# EAGLE board RFM-XXXXS panel (EAGLE 6.3)
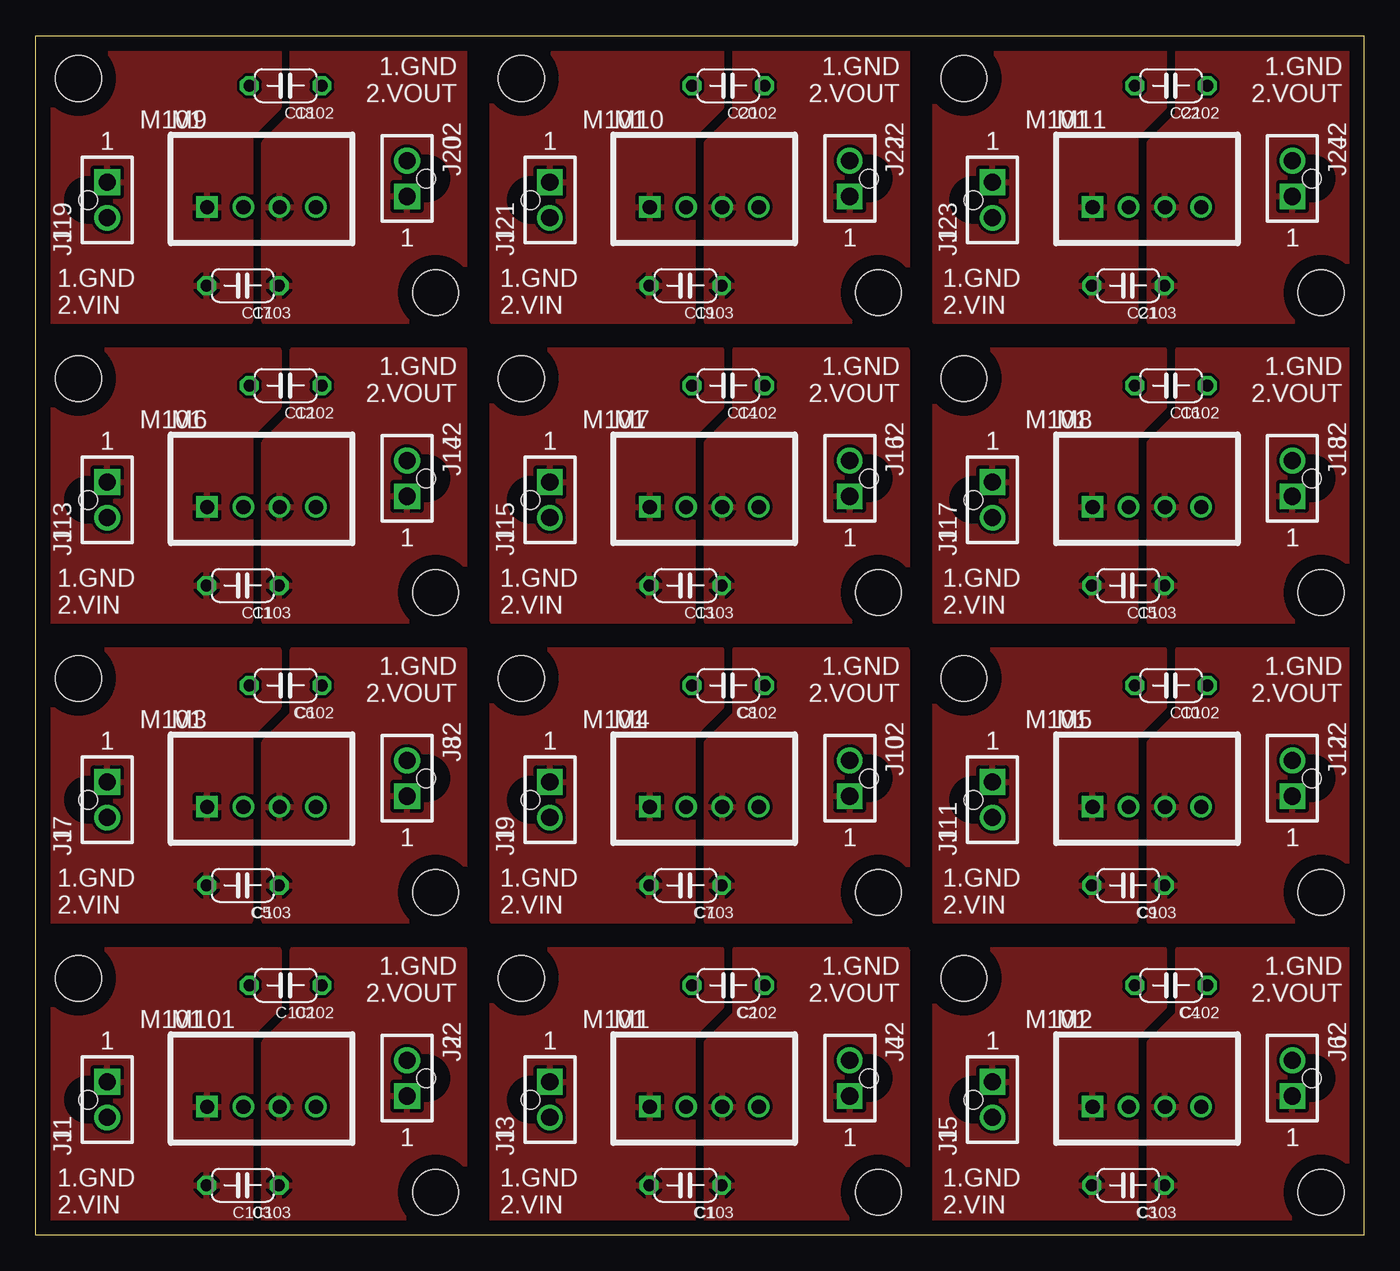
[diagram p0: board, top side]
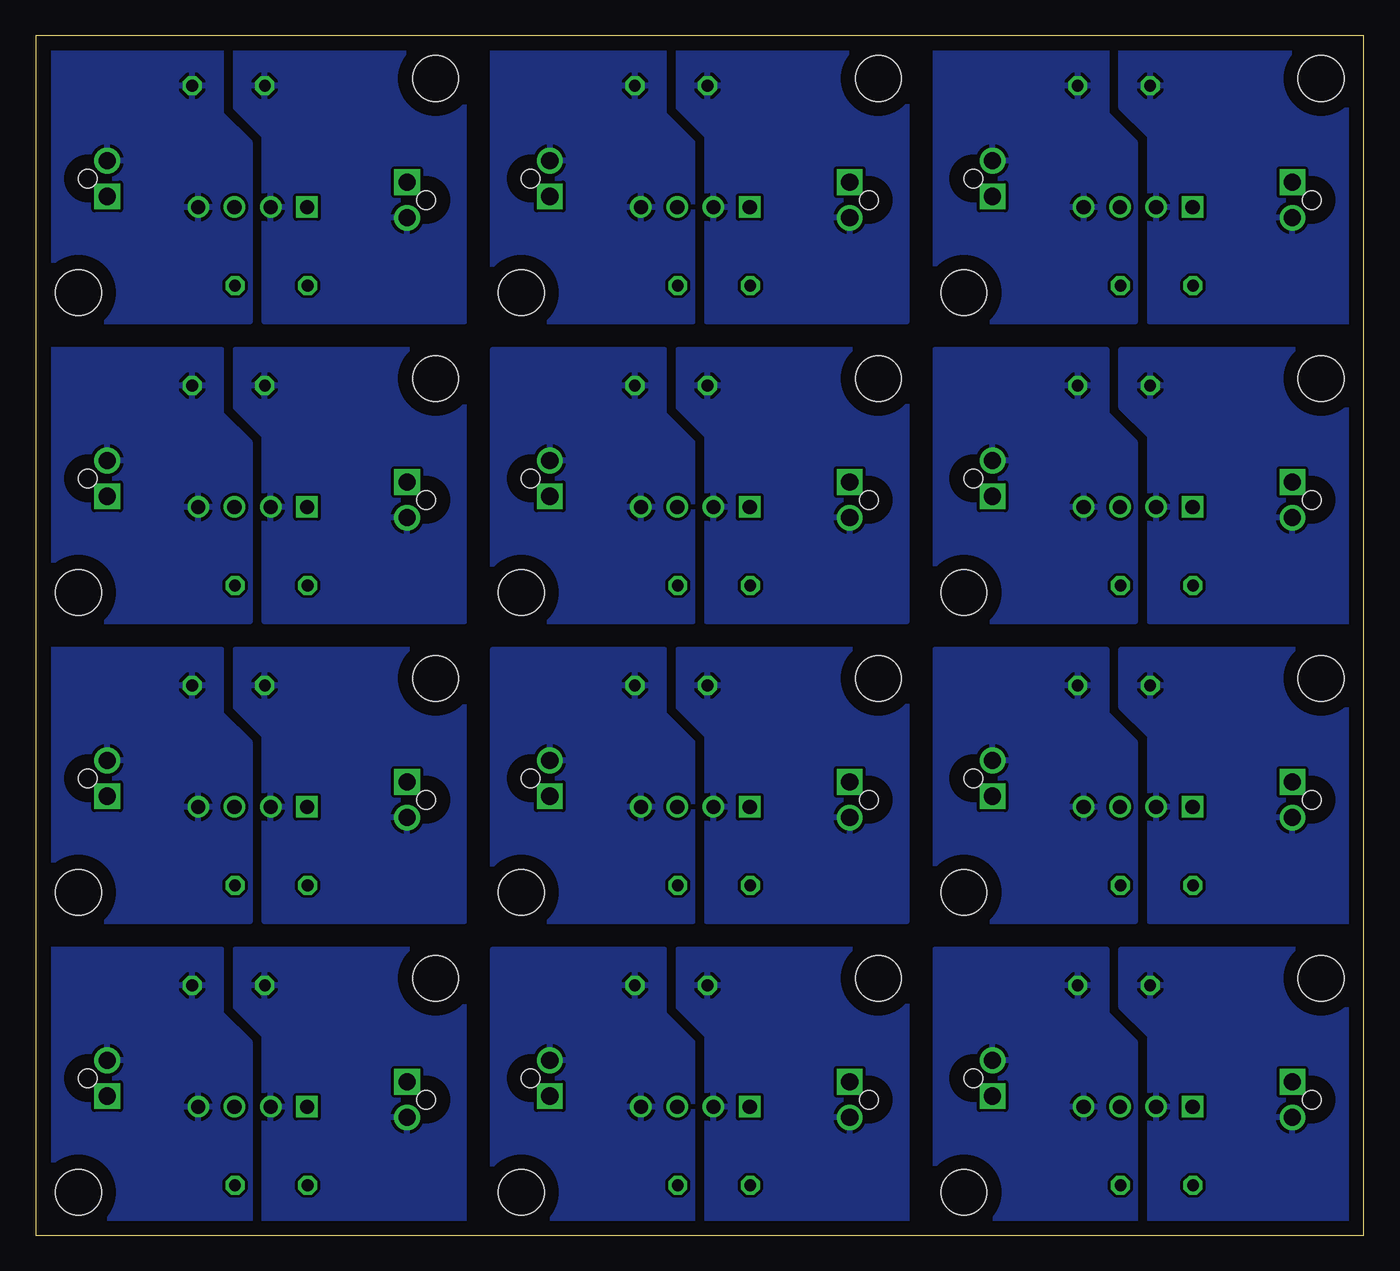
[diagram p1: board, bottom side, seen from below]

Size 93 x 84 mm. Coordinates in mm from the lower left corner, seen from the top.
Outline: 0,84 93,84 93,0 0,0 0,84
Copper layers (1*16): Top 0.035mm / dielectric 1.5mm / Bottom 0.035mm
Design rules "default": minimum track width 10mil, minimum drill 24mil, track to track 8mil, track to pad 8mil, pad to pad 8mil, via to via 8mil, smd to smd 8mil, copper to edge 40mil, drill to drill 8mil, minimum pad ring 10mil, minimum via ring 8mil, stop-mask expansion 4mil, vias tented up to drill 0mil, thermal gap 10mil
Holes 3.2 mm at 3,18 28,3 34,18 59,3 65,18 90,3 3,39 28,24 34,39 59,24 65,39 90,24 3,60 28,45 34,60 59,45 65,60 90,45 3,81 28,66 34,81 59,66 65,81 90,66

## Footprints (pad centres in the part's own frame; a part is rotated, then mirrored left to right if it is on the bottom)
C050-024X044 = drill 0.813 octagon: 1 -2.54,0; 2 2.54,0
PINS_2-NANOFIT = drill 1.2 square: 1 -1.25,0 | drill 1.2: 2 1.25,0 | hole 1.3: 0,-1.34
RFM-XXXXS = drill 1 square: 1 0,0 | drill 1: 2 2.54,0; 3 5.08,0; 4 7.62,0

## Placement (x,y rotation side)
C1  1n 2kV  [C050-024X044]  45.5,3.5 180 top
C2  1n 2kV  [C050-024X044]  48.5,17.5 180 top
C3  1n 2kV  [C050-024X044]  76.5,3.5 180 top
C4  1n 2kV  [C050-024X044]  79.5,17.5 180 top
C5  1n 2kV  [C050-024X044]  14.5,24.5 180 top
C6  1n 2kV  [C050-024X044]  17.5,38.5 180 top
C7  1n 2kV  [C050-024X044]  45.5,24.5 180 top
C8  1n 2kV  [C050-024X044]  48.5,38.5 180 top
C9  1n 2kV  [C050-024X044]  76.5,24.5 180 top
C10  1n 2kV  [C050-024X044]  79.5,38.5 180 top
C11  1n 2kV  [C050-024X044]  14.5,45.5 180 top
C12  1n 2kV  [C050-024X044]  17.5,59.5 180 top
C13  1n 2kV  [C050-024X044]  45.5,45.5 180 top
C14  1n 2kV  [C050-024X044]  48.5,59.5 180 top
C15  1n 2kV  [C050-024X044]  76.5,45.5 180 top
C16  1n 2kV  [C050-024X044]  79.5,59.5 180 top
C17  1n 2kV  [C050-024X044]  14.5,66.5 180 top
C18  1n 2kV  [C050-024X044]  17.5,80.5 180 top
C19  1n 2kV  [C050-024X044]  45.5,66.5 180 top
C20  1n 2kV  [C050-024X044]  48.5,80.5 180 top
C21  1n 2kV  [C050-024X044]  76.5,66.5 180 top
C22  1n 2kV  [C050-024X044]  79.5,80.5 180 top
C102  1n 2kV  [C050-024X044]  17.5,17.5 180 top
C103  1n 2kV  [C050-024X044]  14.5,3.5 180 top
J1  PINS_2-NANOFIT-105309-1102  [PINS_2-NANOFIT]  5,9.5 270 top
J2  PINS_2-NANOFIT-105309-1102  [PINS_2-NANOFIT]  26,11 90 top
J3  PINS_2-NANOFIT-105309-1102  [PINS_2-NANOFIT]  36,9.5 270 top
J4  PINS_2-NANOFIT-105309-1102  [PINS_2-NANOFIT]  57,11 90 top
J5  PINS_2-NANOFIT-105309-1102  [PINS_2-NANOFIT]  67,9.5 270 top
J6  PINS_2-NANOFIT-105309-1102  [PINS_2-NANOFIT]  88,11 90 top
J7  PINS_2-NANOFIT-105309-1102  [PINS_2-NANOFIT]  5,30.5 270 top
J8  PINS_2-NANOFIT-105309-1102  [PINS_2-NANOFIT]  26,32 90 top
J9  PINS_2-NANOFIT-105309-1102  [PINS_2-NANOFIT]  36,30.5 270 top
J10  PINS_2-NANOFIT-105309-1102  [PINS_2-NANOFIT]  57,32 90 top
J11  PINS_2-NANOFIT-105309-1102  [PINS_2-NANOFIT]  67,30.5 270 top
J12  PINS_2-NANOFIT-105309-1102  [PINS_2-NANOFIT]  88,32 90 top
J13  PINS_2-NANOFIT-105309-1102  [PINS_2-NANOFIT]  5,51.5 270 top
J14  PINS_2-NANOFIT-105309-1102  [PINS_2-NANOFIT]  26,53 90 top
J15  PINS_2-NANOFIT-105309-1102  [PINS_2-NANOFIT]  36,51.5 270 top
J16  PINS_2-NANOFIT-105309-1102  [PINS_2-NANOFIT]  57,53 90 top
J17  PINS_2-NANOFIT-105309-1102  [PINS_2-NANOFIT]  67,51.5 270 top
J18  PINS_2-NANOFIT-105309-1102  [PINS_2-NANOFIT]  88,53 90 top
J19  PINS_2-NANOFIT-105309-1102  [PINS_2-NANOFIT]  5,72.5 270 top
J20  PINS_2-NANOFIT-105309-1102  [PINS_2-NANOFIT]  26,74 90 top
J21  PINS_2-NANOFIT-105309-1102  [PINS_2-NANOFIT]  36,72.5 270 top
J22  PINS_2-NANOFIT-105309-1102  [PINS_2-NANOFIT]  57,74 90 top
J23  PINS_2-NANOFIT-105309-1102  [PINS_2-NANOFIT]  67,72.5 270 top
J24  PINS_2-NANOFIT-105309-1102  [PINS_2-NANOFIT]  88,74 90 top
M1  RFM0505S  [RFM-XXXXS]  43,9 0 top
M2  RFM0505S  [RFM-XXXXS]  74,9 0 top
M3  RFM0505S  [RFM-XXXXS]  12,30 0 top
M4  RFM0505S  [RFM-XXXXS]  43,30 0 top
M5  RFM0505S  [RFM-XXXXS]  74,30 0 top
M6  RFM0505S  [RFM-XXXXS]  12,51 0 top
M7  RFM0505S  [RFM-XXXXS]  43,51 0 top
M8  RFM0505S  [RFM-XXXXS]  74,51 0 top
M9  RFM0505S  [RFM-XXXXS]  12,72 0 top
M10  RFM0505S  [RFM-XXXXS]  43,72 0 top
M11  RFM0505S  [RFM-XXXXS]  74,72 0 top
M101  RFM0505S  [RFM-XXXXS]  12,9 0 top

## Library data of the parts
C1-C22 C102 C103 J1-J24 M1-M11 M101 = nolan-utsa

## Nets
0VIN: C103.2 J1.1 M101.1
0VIN1: C1.2 J3.1 M1.1
0VIN2: C3.2 J5.1 M2.1
0VIN3: C5.2 J7.1 M3.1
0VIN4: C7.2 J9.1 M4.1
0VIN5: C9.2 J11.1 M5.1
0VIN6: C11.2 J13.1 M6.1
0VIN7: C13.2 J15.1 M7.1
0VIN8: C15.2 J17.1 M8.1
0VIN9: C17.2 J19.1 M9.1
0VIN10: C19.2 J21.1 M10.1
0VIN11: C21.2 J23.1 M11.1
5V: C102.1 J2.2 M101.4
5V1: C2.1 J4.2 M1.4
5V2: C4.1 J6.2 M2.4
5V3: C6.1 J8.2 M3.4
5V4: C8.1 J10.2 M4.4
5V5: C10.1 J12.2 M5.4
5V6: C12.1 J14.2 M6.4
5V7: C14.1 J16.2 M7.4
5V8: C16.1 J18.2 M8.4
5V9: C18.1 J20.2 M9.4
5V10: C20.1 J22.2 M10.4
5V11: C22.1 J24.2 M11.4
GND: C103.1 J2.1 M101.3
GND1: C1.1 J4.1 M1.3
GND2: C3.1 J6.1 M2.3
GND3: C5.1 J8.1 M3.3
GND4: C7.1 J10.1 M4.3
GND5: C9.1 J12.1 M5.3
GND6: C11.1 J14.1 M6.3
GND7: C13.1 J16.1 M7.3
GND8: C15.1 J18.1 M8.3
GND9: C17.1 J20.1 M9.3
GND10: C19.1 J22.1 M10.3
GND11: C21.1 J24.1 M11.3
VIN: C102.2 J1.2 M101.2
VIN1: C2.2 J3.2 M1.2
VIN2: C4.2 J5.2 M2.2
VIN3: C6.2 J7.2 M3.2
VIN4: C8.2 J9.2 M4.2
VIN5: C10.2 J11.2 M5.2
VIN6: C12.2 J13.2 M6.2
VIN7: C14.2 J15.2 M7.2
VIN8: C16.2 J17.2 M8.2
VIN9: C18.2 J19.2 M9.2
VIN10: C20.2 J21.2 M10.2
VIN11: C22.2 J23.2 M11.2

## Tracks (layer width: path | path; a pad name or v marks a point on that pad's centre or on a via)
0VIN
  pour Top: 1,20 17,20 17,16 15,14 15,1 1,1
0VIN1
  pour Top: 32,20 48,20 48,16 46,14 46,1 32,1
0VIN2
  pour Top: 63,20 79,20 79,16 77,14 77,1 63,1
0VIN3
  pour Top: 1,41 17,41 17,37 15,35 15,22 1,22
0VIN4
  pour Top: 32,41 48,41 48,37 46,35 46,22 32,22
0VIN5
  pour Top: 63,41 79,41 79,37 77,35 77,22 63,22
0VIN6
  pour Top: 1,62 17,62 17,58 15,56 15,43 1,43
0VIN7
  pour Top: 32,62 48,62 48,58 46,56 46,43 32,43
0VIN8
  pour Top: 63,62 79,62 79,58 77,56 77,43 63,43
0VIN9
  pour Top: 1,83 17,83 17,79 15,77 15,64 1,64
0VIN10
  pour Top: 32,83 48,83 48,79 46,77 46,64 32,64
0VIN11
  pour Top: 63,83 79,83 79,79 77,77 77,64 63,64
5V
  pour Bottom: 18,20 30,20 30,1 16,1 16,13.5 18,15.5
5V1
  pour Bottom: 49,20 61,20 61,1 47,1 47,13.5 49,15.5
5V2
  pour Bottom: 80,20 92,20 92,1 78,1 78,13.5 80,15.5
5V3
  pour Bottom: 18,41 30,41 30,22 16,22 16,34.5 18,36.5
5V4
  pour Bottom: 49,41 61,41 61,22 47,22 47,34.5 49,36.5
5V5
  pour Bottom: 80,41 92,41 92,22 78,22 78,34.5 80,36.5
5V6
  pour Bottom: 18,62 30,62 30,43 16,43 16,55.5 18,57.5
5V7
  pour Bottom: 49,62 61,62 61,43 47,43 47,55.5 49,57.5
5V8
  pour Bottom: 80,62 92,62 92,43 78,43 78,55.5 80,57.5
5V9
  pour Bottom: 18,83 30,83 30,64 16,64 16,76.5 18,78.5
5V10
  pour Bottom: 49,83 61,83 61,64 47,64 47,76.5 49,78.5
5V11
  pour Bottom: 80,83 92,83 92,64 78,64 78,76.5 80,78.5
GND
  pour Top: 18,20 30,20 30,1 16,1 16,13.5 18,15.5
GND1
  pour Top: 49,20 61,20 61,1 47,1 47,13.5 49,15.5
GND2
  pour Top: 80,20 92,20 92,1 78,1 78,13.5 80,15.5
GND3
  pour Top: 18,41 30,41 30,22 16,22 16,34.5 18,36.5
GND4
  pour Top: 49,41 61,41 61,22 47,22 47,34.5 49,36.5
GND5
  pour Top: 80,41 92,41 92,22 78,22 78,34.5 80,36.5
GND6
  pour Top: 18,62 30,62 30,43 16,43 16,55.5 18,57.5
GND7
  pour Top: 49,62 61,62 61,43 47,43 47,55.5 49,57.5
GND8
  pour Top: 80,62 92,62 92,43 78,43 78,55.5 80,57.5
GND9
  pour Top: 18,83 30,83 30,64 16,64 16,76.5 18,78.5
GND10
  pour Top: 49,83 61,83 61,64 47,64 47,76.5 49,78.5
GND11
  pour Top: 80,83 92,83 92,64 78,64 78,76.5 80,78.5
VIN
  pour Bottom: 1,20 17,20 17,16 15,14 15,1 1,1
VIN1
  pour Bottom: 32,20 48,20 48,16 46,14 46,1 32,1
VIN2
  pour Bottom: 63,20 79,20 79,16 77,14 77,1 63,1
VIN3
  pour Bottom: 1,41 17,41 17,37 15,35 15,22 1,22
VIN4
  pour Bottom: 32,41 48,41 48,37 46,35 46,22 32,22
VIN5
  pour Bottom: 63,41 79,41 79,37 77,35 77,22 63,22
VIN6
  pour Bottom: 1,62 17,62 17,58 15,56 15,43 1,43
VIN7
  pour Bottom: 32,62 48,62 48,58 46,56 46,43 32,43
VIN8
  pour Bottom: 63,62 79,62 79,58 77,56 77,43 63,43
VIN9
  pour Bottom: 1,83 17,83 17,79 15,77 15,64 1,64
VIN10
  pour Bottom: 32,83 48,83 48,79 46,77 46,64 32,64
VIN11
  pour Bottom: 63,83 79,83 79,79 77,77 77,64 63,64

## Text on the board
tPlace: 1.GND / 2.VOUT | 1.GND / 2.VOUT | 1.GND / 2.VOUT | 1 | 1 | 1 | 1 | 1 | 1 | 1.GND / 2.VIN | 1.GND / 2.VIN | 1.GND / 2.VIN | 1.GND / 2.VOUT | 1.GND / 2.VOUT | 1.GND / 2.VOUT | 1 | 1 | 1 | 1 | 1 | 1 | 1.GND / 2.VIN | 1.GND / 2.VIN | 1.GND / 2.VIN | 1.GND / 2.VOUT | 1.GND / 2.VOUT | 1.GND / 2.VOUT | 1 | 1 | 1 | 1 | 1 | 1 | 1.GND / 2.VIN | 1.GND / 2.VIN | 1.GND / 2.VIN | 1.GND / 2.VOUT | 1.GND / 2.VOUT | 1.GND / 2.VOUT | 1 | 1 | 1 | 1 | 1 | 1 | 1.GND / 2.VIN | 1.GND / 2.VIN | 1.GND / 2.VIN
_tNames: C102 | C102 | C102 | M101 | J2 | M101 | J2 | M101 | J2 | J1 | J1 | J1 | C103 | C103 | C103 | C102 | C102 | C102 | M101 | J2 | M101 | J2 | M101 | J2 | J1 | J1 | J1 | C103 | C103 | C103 | C102 | C102 | C102 | M101 | J2 | M101 | J2 | M101 | J2 | J1 | J1 | J1 | C103 | C103 | C103 | C102 | C102 | C102 | M101 | J2 | M101 | J2 | M101 | J2 | J1 | J1 | J1 | C103 | C103 | C103